# Altium PCB PMOD_OV7670.pcbdoc
Units mil, origin at the board's own origin, x right, y up, seen from the top; angles counter-clockwise.
Board outline 1100 x 1570.03 mil, 2 copper layers (Top Layer, Bottom Layer); 22 components, 34 nets, 84 pads, 6 vias.
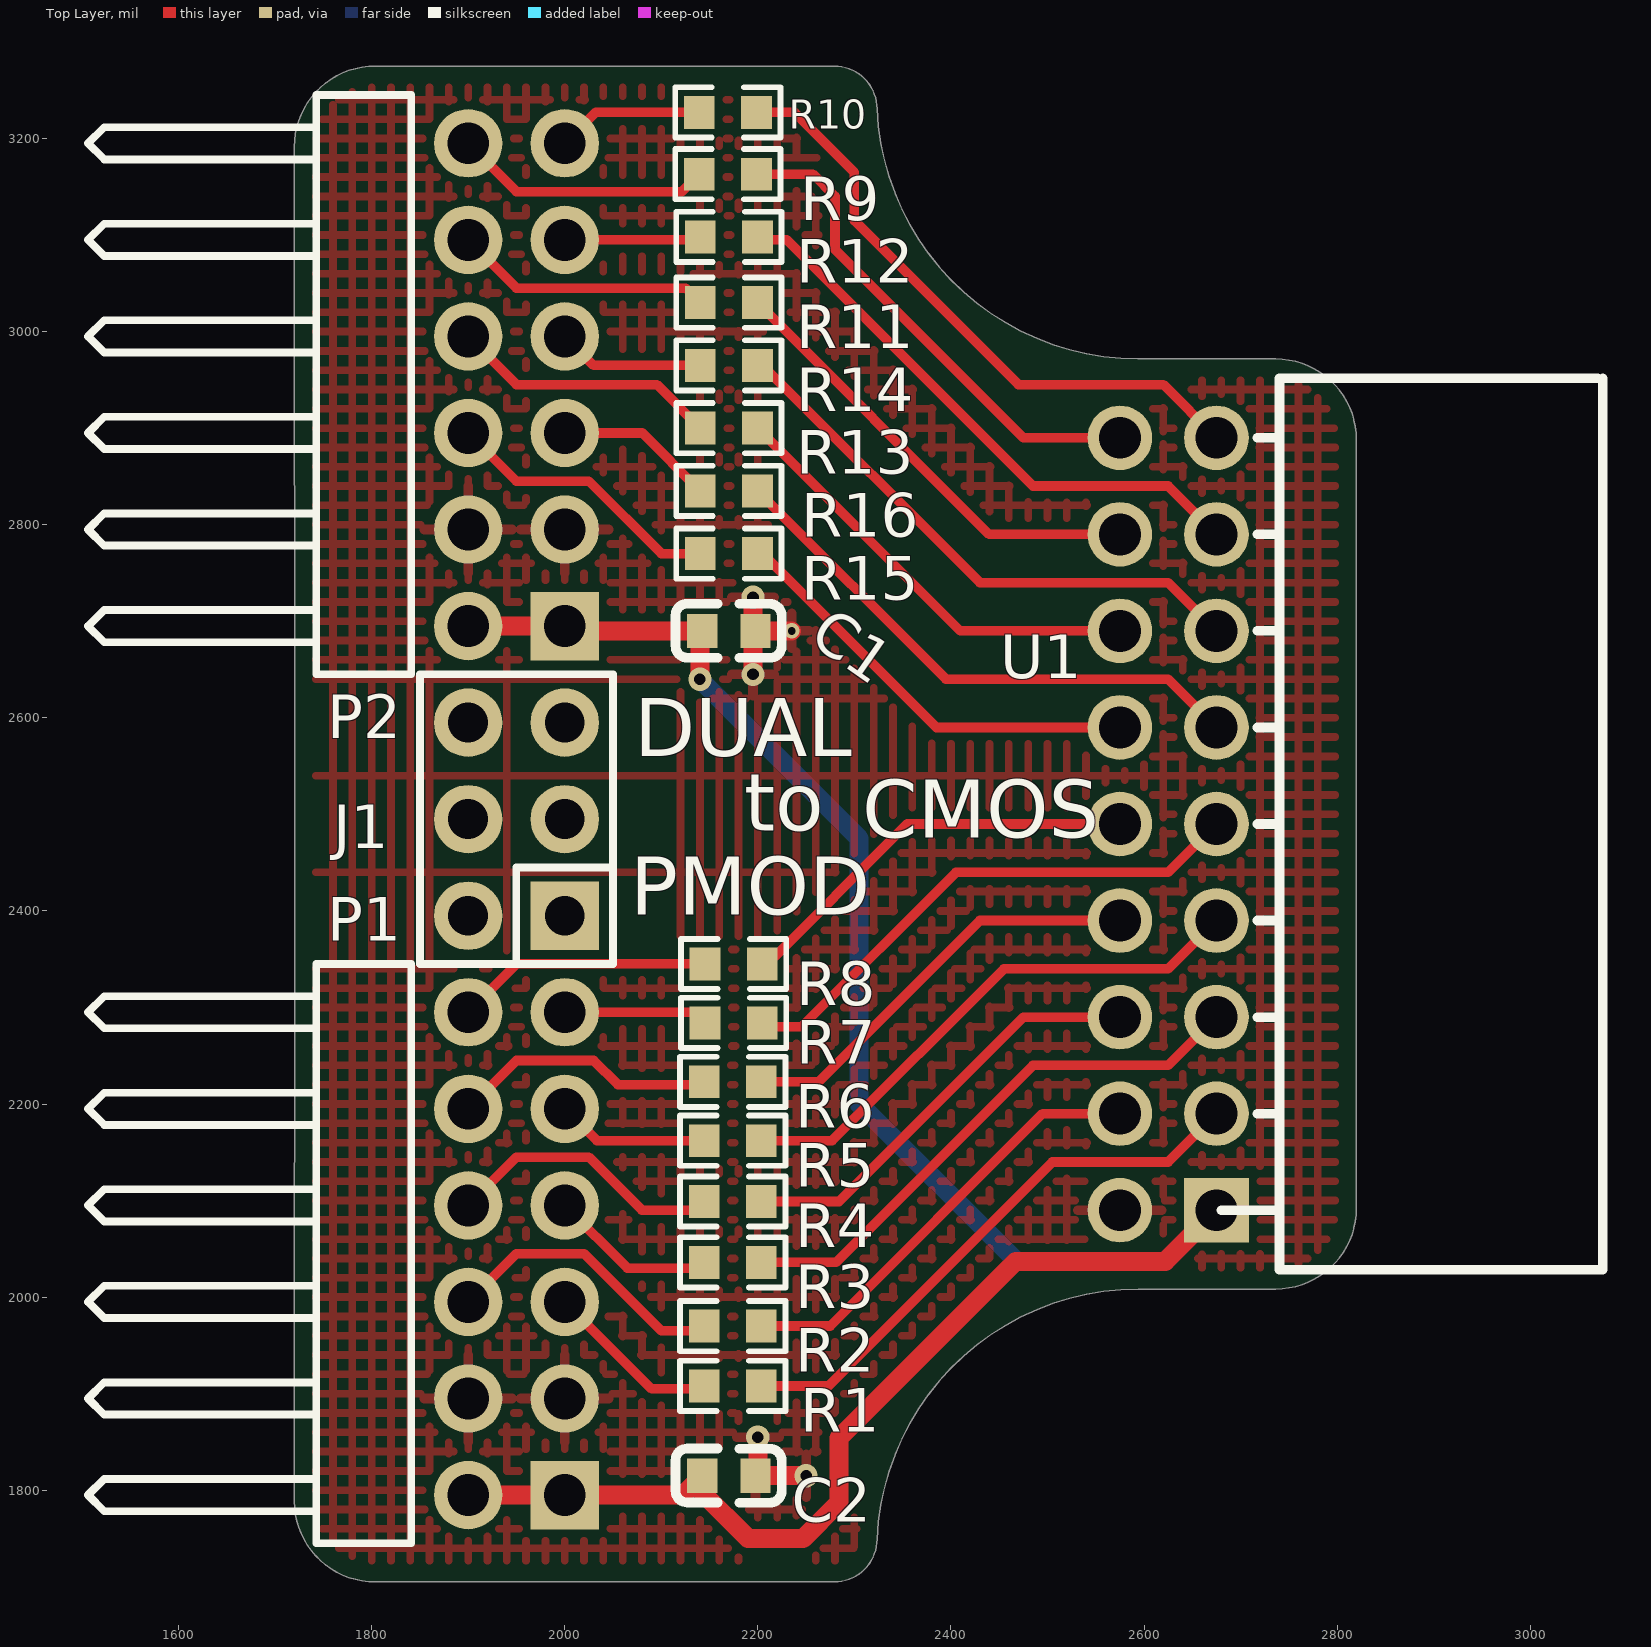
[diagram p0: Top Layer view]
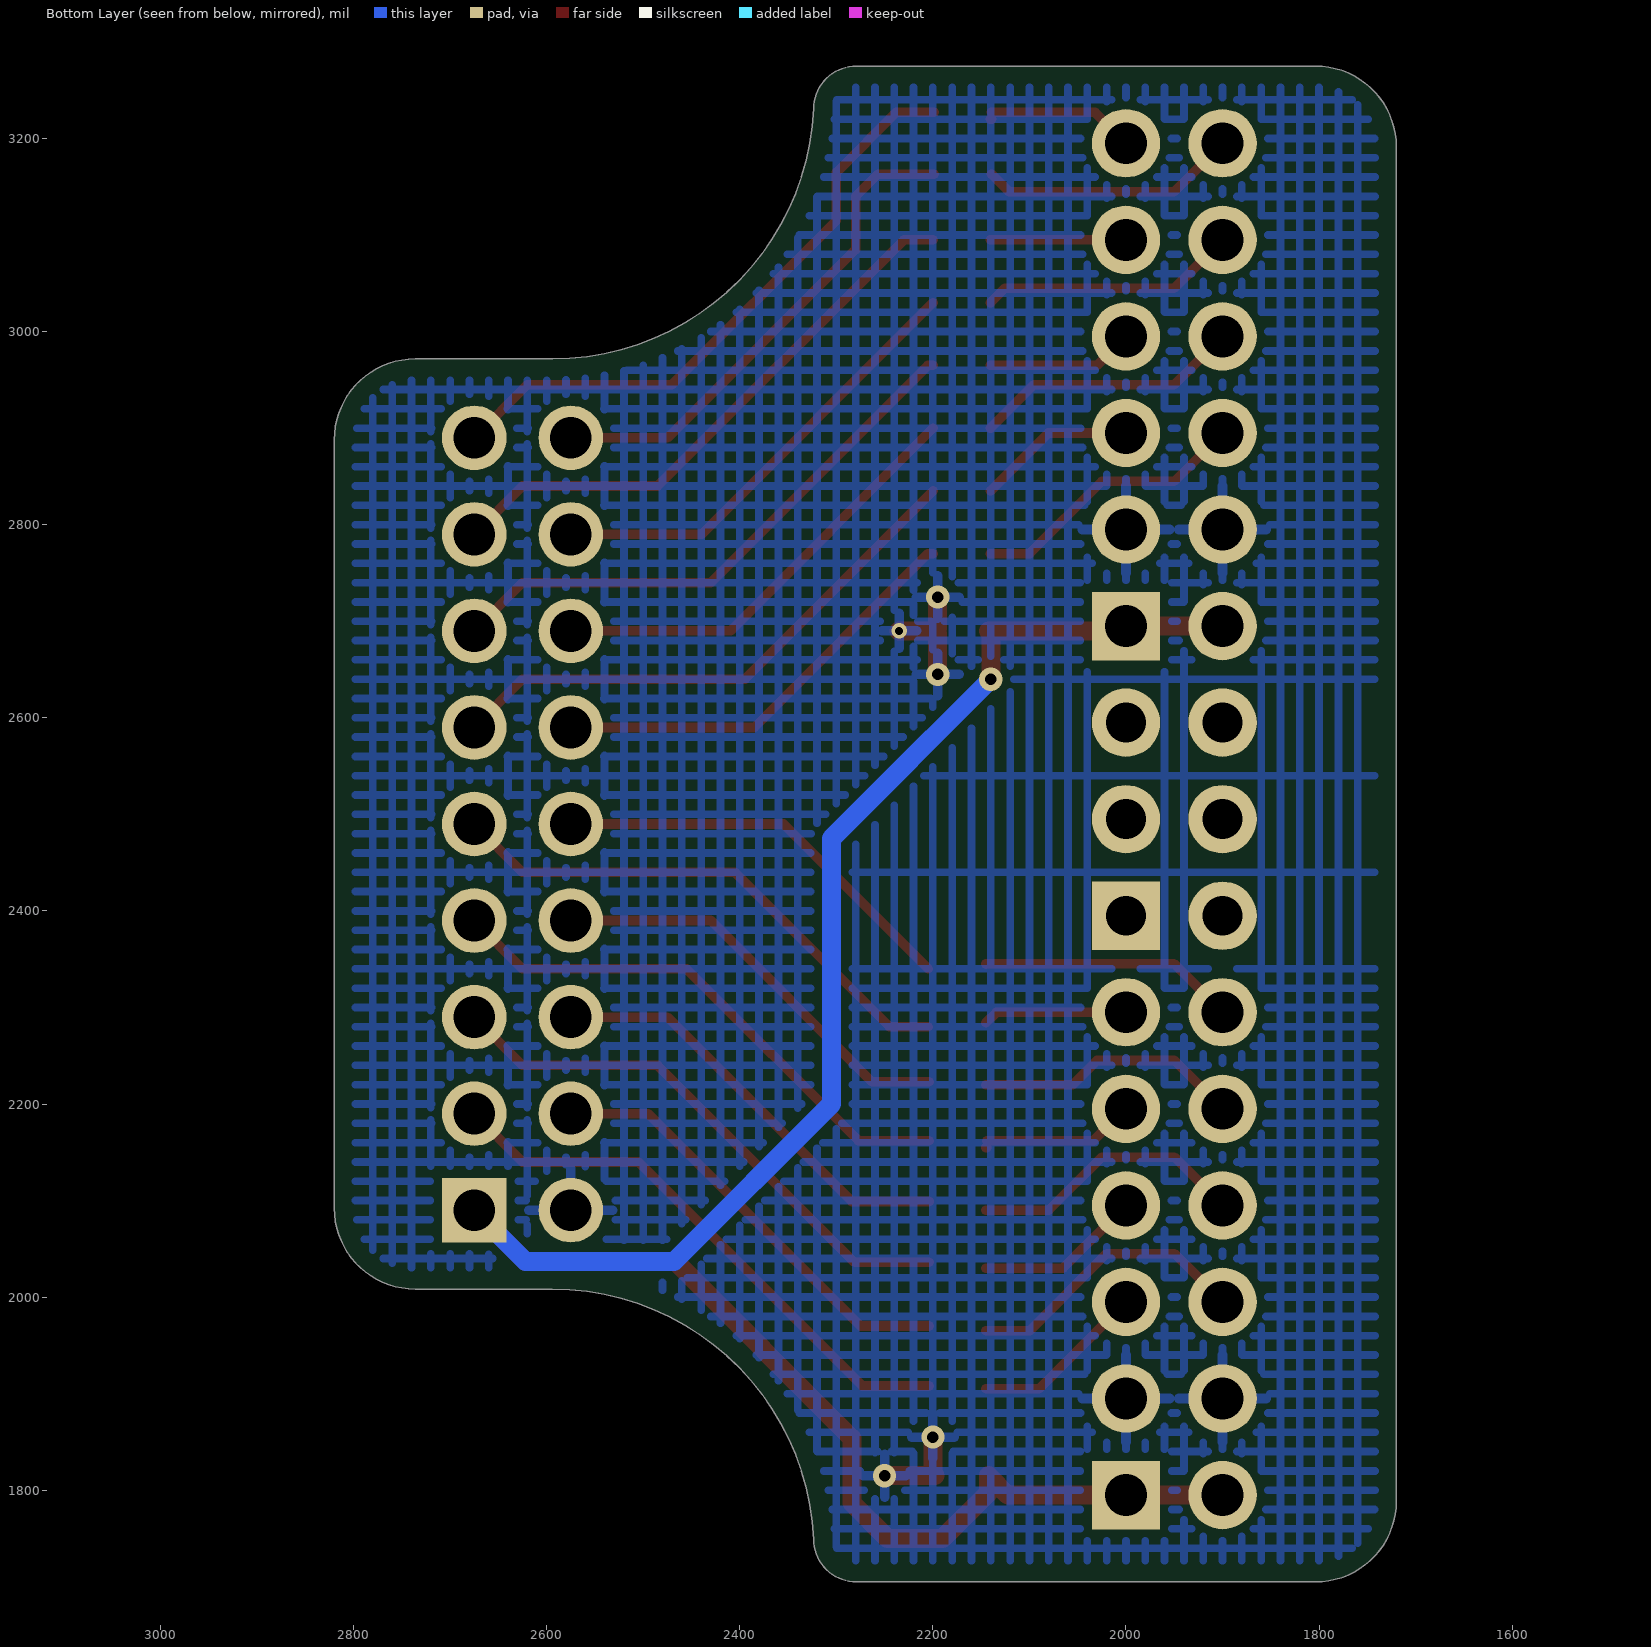
[diagram p1: Bottom Layer view, seen from below]

## Layer stack, top to bottom
Top Solder: solder mask 0.4, Solder Resist, Dk 3.5
Top Layer: signal copper 1.4
Dielectric1: dielectric 12.6, FR-4, Dk 4.8
Bottom Layer: signal copper 1.4
Bottom Solder: solder mask 0.4, Solder Resist, Dk 3.5

## Board outline
1720,1788.77 ccw(c1803.76,1788.74) 1803.76,1704.98 2279.12,1704.98 ccw(c2279.12,1749.37) 2323.5,1749.26 cw(c2594.26,1737.35) 2594.05,2008.37 cw(c2594.26,1737.35) 2594.08,2008.37 2736.24,2008.37 ccw(c2736.24,2092.13) 2820,2092.13 2820,2887.87 ccw(c2736.24,2887.87) 2736.24,2971.63 2594.08,2971.63 ccw(c2594.08,2966.61) 2594.05,2971.63 ccw(c2594.26,3242.65) 2594.08,2971.63 2594.05,2971.63 cw(c2594.26,3242.65) 2323.5,3230.74 ccw(c2279.12,3230.63) 2279.12,3275.01 1803.76,3275.01 ccw(c1803.76,3191.26) 1720,3191.23 1720.27,2490

## Design rules (kind name [scope] priority, off if disabled: settings)
Clearance Clearance_1 [InComponent('J1')] p1: gap=0
Clearance [All] p2: gap=8
ComponentClearance [All] p1: gap=2 collisioncheckmode=3 verticalgap=2 showdistances=FALSE
HoleSize [All] p1: absolutevalues=TRUE maxlimit=200 minlimit=1 maxpercent=80.000 minpercent=20.000
MinimumSolderMaskSliver [All] p1: minsoldermaskwidth=0
PolygonConnect [All] p1: connectstyle=Relief reliefconductorwidth=10 reliefentries=4 polygonreliefangle="90 Angle" airgapwidth=10
RoutingVias [All] p1: holewidth=28 width=50 viastyle="Through Hole" minholewidth=28 minwidth=50 maxholewidth=28 maxwidth=50
SilkToBoardRegionClearance [All] p1 off:
SilkToSilkClearance [All] p1: silktosilkclearance=0
SilkToSolderMaskClearance [IsPad] p1: minsilkscreentomaskgap=0 clearancetoexposedcopper=TRUE
SolderMaskExpansion [All] p1: expansion=4
Width [All] p1: maxlimit=100 minlimit=5 preferedwidth=10
24 further rules are at their usual default settings.

## Components (designator, comment, footprint, x,y, rotation, side; value= is the part's Value field where it differs from the comment)
C1 "100nF" C0603 2170,2690 r0 top
C2 "100nF" C0603 2170,1815 r0 top
J1 "Header-Male-2.54_2x3" HDR-TH_6P-P2.54-V-M-R2-C3-S2.54-1 1950,2495 r90 top
P1 "2*6P header" HDR-TH_12P-P2.54-H-M-R2-C6-S2.54-W12.5 1950,2045 r270 top
P2 "2*6P header" HDR-TH_12P-P2.54-H-M-R2-C6-S2.54-W12.5 1950,2945 r270 top
R1 "33" R0603 2174,1908 r180 top
R2 "33" R0603 2174,1970 r0 top
R3 "33" R0603 2174,2036 r180 top
R4 "33" R0603 2174,2099 r0 top
R5 "33" R0603 2174,2162 r180 top
R6 "33" R0603 2174,2223 r0 top
R7 "33" R0603 2175,2284 r180 top
R8 "33" R0603 2175,2345 r0 top
R9 "33" R0603 2169,3163 r0 top
R10 "33" R0603 2169,3227 r180 top
R11 "33" R0603 2170,3030 r0 top
R12 "33" R0603 2170,3098 r180 top
R13 "33" R0603 2170,2900 r0 top
R14 "33" R0603 2170,2965 r180 top
R15 "33" R0603 2170,2770 r0 top
R16 "33" R0603 2170,2835 r180 top
U1 "PM254-2-09-W-8.5" HDR-TH_18P-P2.54-H-F-R2-C9-W8.5 2625,2490 r90 top

## Footprints (in the part's own frame and the unit in brackets; to place one, negate y for a bottom-side part, rotate by r counter-clockwise, add the part's x,y. Pads: shape width x height; smd on the part's side, far side on the other; paste and mask are expansions set on the pad)
C0603 [mm]
  rect 0.8x0.9 smd: 1(-0.7,0) 2(0.7,0)
  silkscreen extent -1.41,-0.71 1.39,0.72
HDR-TH_6P-P2.54-V-M-R2-C3-S2.54-1 [mm]
  rect 1.8x1.8 hole 1.05: 1(-2.54,-1.27)
  round 1.8 hole 1.05: 2(-2.54,1.27) 3(0,-1.27) 4(0,1.27) 5(2.54,-1.27) 6(2.54,1.27)
  silkscreen extent -3.81,-2.54 3.81,2.54
HDR-TH_12P-P2.54-H-M-R2-C6-S2.54-W12.5 [mm]
  rect 1.8x1.8 hole 1.1: 1(6.35,1.27)
  round 1.8 hole 1.1: 2(6.35,-1.27) 3(3.81,1.27) 4(3.81,-1.27) 5(1.27,1.27) 6(1.27,-1.27) 7(-1.27,1.27) 8(-1.27,-1.27) 9(-3.81,1.27) 10(-3.81,-1.27) 11(-6.35,1.27) 12(-6.35,-1.27)
  silkscreen extent -7.62,-11.27 7.62,-2.77
HDR-TH_18P-P2.54-H-F-R2-C9-W8.5 [mm]
  rect 1.7x1.7 hole 1.1: 1(-10.16,-1.27)
  round 1.7 hole 1.1: 2(-10.16,1.27) 3(-7.62,-1.27) 4(-7.62,1.27) 5(-5.08,-1.27) 6(-5.08,1.27) 7(-2.54,-1.27) 8(-2.54,1.27) 9(0,-1.27) 10(0,1.27) 11(2.54,-1.27) 12(2.54,1.27) 13(5.08,-1.27) 14(5.08,1.27) 15(7.62,-1.27) 16(7.62,1.27) 17(10.16,-1.27) 18(10.16,1.27)
  silkscreen extent -11.73,-11.43 11.73,-1.4
R0603 [mil]
  rect 31.75x34.02 smd: 1(-29.66,0) 2(29.66,0)
  silkscreen extent -55,-26 55,26

## Via types
v1: diameter 24, hole 12, Top Layer to Bottom Layer, 5 vias
v2: diameter 16, hole 8, Top Layer to Bottom Layer, 1 vias

## Nets (pads, with @x,y where several pads share a name; then routed paths per layer and width w, separated by ;. In a path a pad name is that pad's centre, name@x,y a point inside that pad or via, vN(x,y) a via of type N, cw(c..) or ccw(c..) an arc to the next point about the centre after c; other vN are vias at no path point)
3.3V_VCC: C1.1 C2.1 P1.1 P1.2 P2.1 P2.2 U1.1 | length 2433.6
  Top Layer w19.68: P1.2 2122.44,1795 C2.1 2142.44,1797.56 2190,1750 2247,1750 2284,1787 2284,1854 2467,2037 2622,2037 U1.1 ; P2.2 P2.1 2004.99,2690 C1.1 2140,2687.56 v1(2140,2640)
  Bottom Layer w19.68: 2260,2520 v1(2140,2640) 2305,2475 2305,2200 2468,2037 2622,2037 U1.1
D0: R11.2 U1.16 | length 474.8
  Top Layer w10: R11.2 2439.66,2790 U1.16
D1: R12.1 U1.15 | length 601.7
  Top Layer w10: R12.1@2199.66,3095 2230,3095 2485,2840 2625,2840 U1.15
D2: R13.2 U1.14 | length 462.3
  Top Layer w10: R13.2 2409.66,2690 U1.14
D3: R14.1 U1.13 | length 589.2
  Top Layer w10: R14.1 2205,2965 2430,2740 2625,2740 U1.13
D4: R15.2 U1.12 | length 449.9
  Top Layer w10: R15.2 2205,2770 2385,2590 U1.12
D5: R16.1 U1.11 | length 576.8
  Top Layer w10: R16.1 2394.66,2640 2625,2640 U1.11
D6: R8.2 U1.10 | length 432.5
  Top Layer w10: R8.2@2204.66,2340 2354.66,2490 U1.10
D7: R7.1 U1.9 | length 557.3
  Top Layer w10: R7.1@2204.7,2280 2245,2280 2405,2440 2625,2440 U1.9
GND: C1.2 C2.2 P1.3 P1.4 P2.3 P2.4 U1.2 | length 213
  Top Layer w19.68: v1(2195,2645) 2195,2687.44 C1.2 ; v1(2195,2725) 2195,2692.56 C1.2 ; v1(2200,1855) 2200,1817.44 C2.2 v1(2250,1815) ; v2(2235,2690) C1.2
HS: R4.2 U1.6 | length 450.5
  Top Layer w10: R4.2 2284,2099 2475,2290 U1.6
MCLK: R6.2 U1.8 | length 490.7
  Top Layer w10: R6.2 2263,2223 ; 2298.5,2258.5 2263,2223 ; U1.8 2430,2390 2263,2223
NetP1_5: P1.5 R1.2 | length 182.6
  Top Layer w10: P1.5 2089.99,1905 R1.2@2145.34,1905
NetP1_6: P1.6 R2.1 | length 299.2
  Top Layer w10: P1.6 1950,2045 2020,2045 2100,1965 R2.1@2145.34,1965
NetP1_7: P1.7 R3.2 | length 172.3
  Top Layer w10: P1.7 2064.99,2030 R3.2@2145.34,2030
NetP1_8: P1.8 R4.1 | length 288.8
  Top Layer w10: P1.8 1950,2145 2025,2145 2080,2090 R4.1@2145.34,2090
NetP1_9: P1.9 R5.2 | length 159
  Top Layer w10: P1.9 2000.46,2195 2033.46,2162 R5.2 ; R5.2@2144.34,2155 R5.2@2145.34,2155
NetP1_10: P1.10 R6.1 | length 276.4
  Top Layer w10: P1.10 1950,2245 2030,2245 2055,2220 R6.1@2145.34,2220
NetP1_11: P1.11 R7.2 | length 149.9
  Top Layer w10: P1.11 2134.34,2295 R7.2
NetP1_12: P1.12 R8.1 | length 266.4
  Top Layer w10: P1.12 1950.43,2345.43 2144.91,2345.43 R8.1
NetP2_5: P2.5 R16.2 | length 165.2
  Top Layer w10: P2.5 2080.34,2895 R16.2
NetP2_6: P2.6 R15.1 | length 292.1
  Top Layer w10: P2.6 1949.99,2845 2025,2845 2100,2770 R15.1
NetP2_7: P2.7 R14.2 | length 152.8
  Top Layer w10: P2.7 2029.99,2965 R14.2
NetP2_8: P2.8 R13.1 | length 279.7
  Top Layer w10: P2.8 1949.99,2945 2095.34,2945 R13.1
NetP2_9: P2.9 R12.2 | length 280.7
  Top Layer w10: P2.9 2140.34,3095 P2.9
NetP2_10: P2.10 R11.1 | length 267.3
  Top Layer w10: P2.10 1949.99,3045 2125.34,3045 R11.1
NetP2_11: P2.11 R10.2 | length 153.6
  Top Layer w10: P2.11 2032,3227 R10.2 ; R10.2@2139.34,3220 R10.2@2140.34,3220
NetP2_12: P2.12 R9.1 | length 267.5
  Top Layer w10: P2.12 1950,3145 2121.34,3145 R9.1
PCLK: R5.1 U1.7 | length 565.8
  Top Layer w10: R5.1 2277,2162 2455,2340 2625,2340 U1.7
PWDN: R9.2 U1.18 | length 521.6
  Top Layer w10: R9.2 2257,3163 2280,3140 2280,3085 2475,2890 U1.18
RESET: R10.1 U1.17 | length 645.2
  Top Layer w10: R10.1 2238,3227 2300,3165 2300,3115 2470,2945 2620,2945 U1.17
SCL: R1.1 U1.3 | length 588.2
  Top Layer w10: R1.1 2273,1908 2505,2140 2625,2140 U1.3
SDA: R2.2 U1.4 | length 462.5
  Top Layer w10: R2.2 2275,1970 2495,2190 U1.4
VS: R3.1 U1.5 | length 576.6
  Top Layer w10: R3.1 2281,2036 2485,2240 2625,2240 U1.5
pads on no net: J1.1 J1.2 J1.3 J1.4 J1.5 J1.6

## Polygon pours and split planes (outlines as drawn)
GND on Bottom Layer "Bottom Layer-No Net" (hatched 90Degree grid 20 track 8, remove dead copper, pour order 8): 1577,3370 3008,3370 3125,3253 3015,3143 3015,1893 2632,1893 2358,1619 2325,1652 1425,1652
GND on Top Layer "Bottom Layer-No Net" (hatched 90Degree grid 20 track 8, remove dead copper, pour order 10): 1502,3467 3081,3467 3258,3290 3090,3122 3090,1668 1401,1668 1230,1497

## Keep-outs
Mechanical 1:
  lines w10: 1725.02,1788.77 ccw(c1803.76,1788.74) 1803.76,1710 ; 1725.02,3191.23 cw(c1803.76,3191.26) 1803.76,3270 ; 2279.12,1710 ccw(c2279.12,1749.37) 2318.49,1749.37 cw(c2594.26,1737.35) 2594.08,2013.39 ; 2279.12,3270 cw(c2279.12,3230.63) 2318.49,3230.63 ccw(c2594.26,3242.65) 2594.08,2966.61 ; 2736.24,2013.39 ccw(c2736.24,2092.13) 2814.98,2092.13 ; 2736.24,2966.61 cw(c2736.24,2887.87) 2814.98,2887.87

## Silkscreen, mask and mechanical layers (free items; w line width, h text height)
Top Overlay:
  text "DUAL" at 2072,2560 h60
  text "to" at 2186,2483 h60
  text "CMOS" at 2308,2476 h60
  text "PMOD" at 2068,2396 h60
Mechanical 1:
  lines w10: 1725.02,1788.77 1725.29,2490 1725.02,3191.23 ; 1803.76,1710 2279.12,1710 ; 1803.76,3270 2279.12,3270 ; 2594.08,2013.39 2736.24,2013.39 ; 2594.08,2966.61 2736.24,2966.61 ; 2814.99,2092.13 2814.99,2495 ; 2814.99,2485 2814.99,2887.87
Document:
  lines w0.1: 2289,2424 2291,2426